# Altium PCB char.PcbDoc
Units mm, origin at the board's own origin, x right, y up, seen from the top; angles counter-clockwise.
Board outline 152.4 x 101.6 mm, 2 copper layers (Top Layer, Bottom Layer); 32 components, 40 nets, 77 pads, 0 vias.
Unrouted connection lines stored in the file: 43.
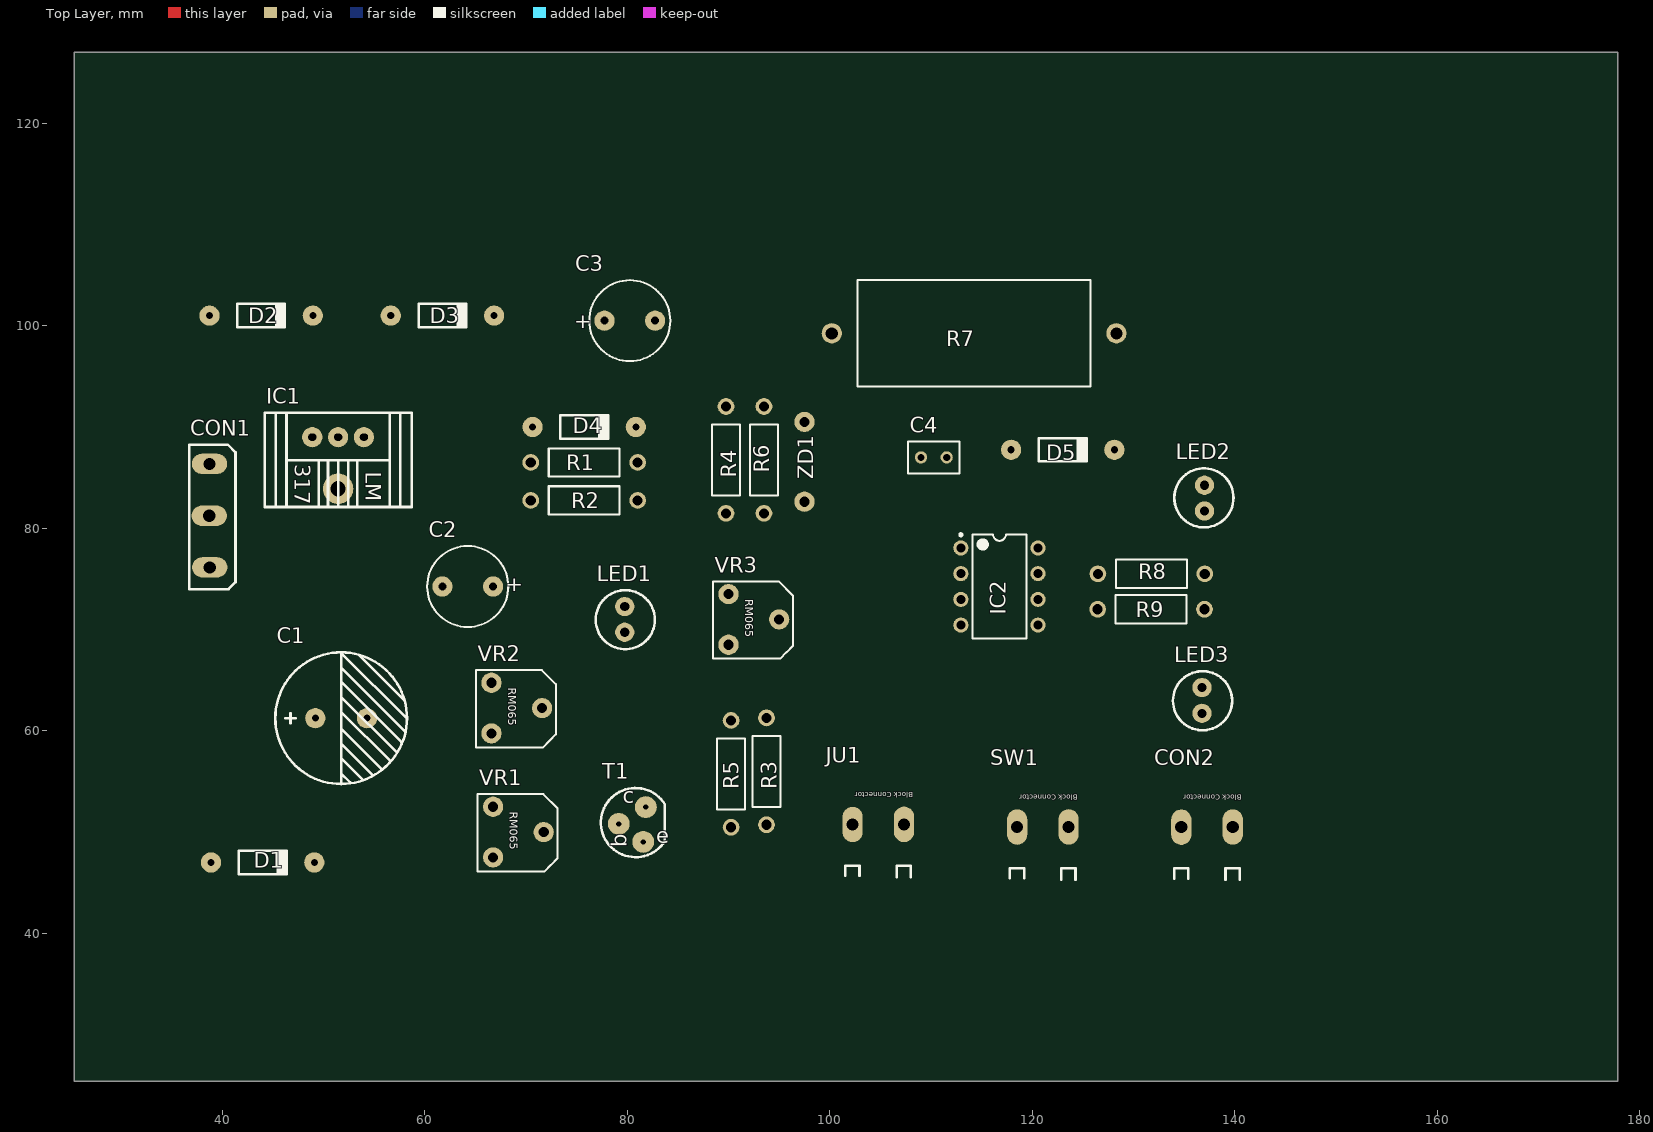
[diagram p0: Top Layer view]
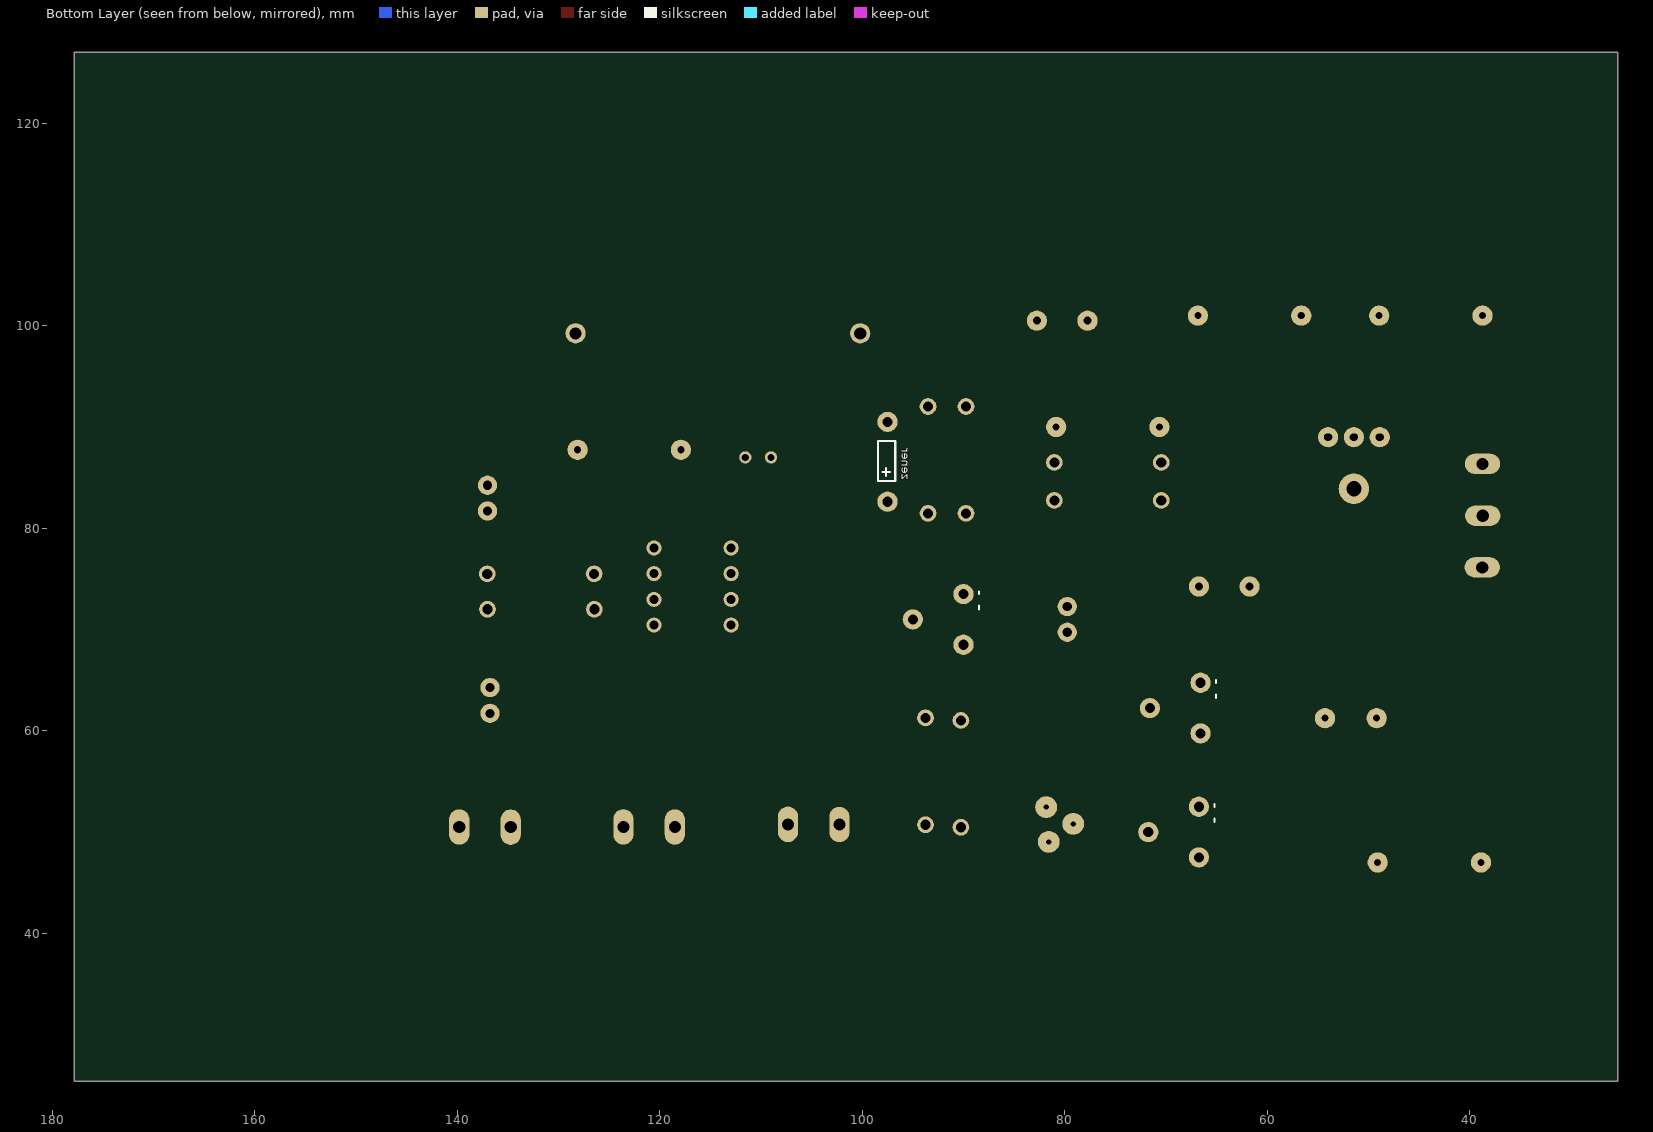
[diagram p1: Bottom Layer view, seen from below]

## Layer stack, top to bottom
Top Solder: solder mask 0.0102, Solder Resist, Dk 3.5
Top Layer: signal copper 0.0356
Dielectric 1: dielectric 0.32, FR-4, Dk 4.8
Bottom Layer: signal copper 0.0356
Bottom Solder: solder mask 0.0102, Solder Resist, Dk 3.5

## Board outline
25.4,25.4 177.8,25.4 177.8,127 25.4,127

## Design rules (kind name [scope] priority, off if disabled: settings)
Clearance [All] p1: gap=0.254 ignorepadtopadclearanceinfootprint=FALSE except(0: Arc-Hole Track-Hole SMDPad-Hole THPad-Hole Via-Hole Fill-Hole Poly-Hole Region-Hole Text-Hole)
PolygonConnect [All] p1: connectstyle=Relief reliefconductorwidth=0.254 reliefentries=4 polygonreliefangle="90 Angle" airgapwidth=0.254
RoutingVias [All] p1: holewidth=0.711 width=1.27 viastyle="Through Hole" minholewidth=0.711 minwidth=1.27 maxholewidth=0.711 maxwidth=1.27
SolderMaskExpansion [All] p1: expansion=0.102 istentingtop=FALSE
Width [All] p1: maxlimit=0.254 minlimit=0.254 preferedwidth=0.254
30 further rules are at their usual default settings.

## Components (designator, comment, footprint, x,y, rotation, side; value= is the part's Value field where it differs from the comment)
C1 "Comment" "2200uF 25V" 51.75,61.25 r180 top
C2 "Comment" CAPPR5-8x5 64.25,74.25 r180 top
C3 "Comment" CAPPR5-8x5 80.25,100.5 r0 top
C4 "Comment" C320C 117.27,94 r0 top
CON1 "Comment" "PCB Connector 3 pin" 38.75,81.25 r90 top
CON2 "Comment" "PCB Block Connector"#1 137.25,50.25 r180 top
D1 "Comment" "1N4007 Diode" 44,47 r0 top
D2 "Comment" "1N4007 Diode" 43.85,101 r0 top
D3 "Comment" "1N4007 Diode" 61.75,101 r0 top
D4 "Comment" "1N4007 Diode" 75.75,90 r0 top
D5 "Comment" "1N4007 Diode" 123,87.75 r0 top
IC1 "Comment" "LM317 with Heat Sink" 51.45,89 r180 top
IC2 "Comment" DIP-8 116.75,74.25 r0 top
JU1 "Comment" "PCB Block Connector"#1 104.79,50.51 r180 top
LED1 "Comment" LED 79.75,71 r0 top
LED2 "Comment" LED 137,82.98 r180 top
LED3 "Comment" LED 136.75,63 r0 top
R1 "Comment" RES10.55-7X2.8 75.75,86.5 r0 top
R2 "Comment" RES10.55-7X2.8 75.75,82.75 r0 top
R3 "Comment" RES10.55-7X2.8 93.75,56 r90 top
R4 "Comment" RES10.55-7X2.8 89.75,86.75 r90 top
R5 "Comment" RES10.55-7X2.8 90.25,55.75 r90 top
R6 "Comment" RES10.55-7X2.8 93.5,86.75 r90 top
R7 "Comment" RES28.1-23X10.5 114.25,99.25 r0 top
R8 "Comment" RES10.55-7X2.8 131.75,75.5 r0 top
R9 "Comment" RES10.55-7X2.8 131.725,72 r0 top
SW1 "Comment" "PCB Block Connector"#2 121.04,50.26 r180 top
T1 "Comment" "TO-92 Packaging" 80.5,50.75 r0 top
VR1 "Comment" PCBComponent_1#1 67.909,54.007 r270 top
VR2 "Comment" PCBComponent_1#1 67.75,66.25 r270 top
VR3 "Comment" PCBComponent_1#1 91.159,75.007 r270 top
ZD1 "Comment" PCBComponent_1#2 95.341,83.642 r90 top

## Footprints (in the part's own frame and the unit in brackets; to place one, negate y for a bottom-side part, rotate by r counter-clockwise, add the part's x,y. Pads: shape width x height; smd on the part's side, far side on the other; paste and mask are expansions set on the pad)
"1N4007 Diode" [mm]
  round 2 hole 0.7: n(5.1,0) p(-5.1,0)
  silkscreen extent -2.35,-1.15 2.35,1.15
"2200uF 25V" [mm] "13mm Diameter 5.1mm pin distance"
  round 2 hole 0.7: +(2.55,0) -(-2.55,0)
  silkscreen extent -6.5,-6.5 6.5,6.5
C320C [mm]
  round 1.21 hole 0.71: 1(-8.27,-7) 2(-5.73,-7)
  silkscreen extent -9.54,-8.59 -4.46,-5.41
CAPPR5-8x5 [mm] "Capacitor, Electrolytic, Radial; Body 8 x 5 mm (Dia.xH typ); Pin Spacing 5 mm (typ)"
  round 2 hole 0.8: 1(-2.5,0) 2(2.5,0)
  silkscreen extent -4,-4 4,4
DIP-8 [mm] "DIP, 8-Pin, Row Spacing 7.62 mm, Pitch 2.54 mm"
  round 1.5 hole 0.9: 1(-3.81,3.81) 2(-3.81,1.27) 3(-3.81,-1.27) 4(-3.81,-3.81) 5(3.81,-3.81) 6(3.81,-1.27) 7(3.81,1.27) 8(3.81,3.81)
  silkscreen extent -3.93,-5.15 2.65,5.23, body extent -3.6,-5.15 3.6,5.15, height 5.33
LED [mm]
  round 1.9 hole 0.9: 1(0,1.27) 2(0,-1.27)
  silkscreen extent -2.87,-2.95 2.98,2.89
"LM317 with Heat Sink" [mm]
  round 2 hole 0.7 slot 0.8 at 0 deg: adj(-2.55,0) in(2.55,0) out(0,0)
  round 3 hole 1.5: out(0,5.1)
  silkscreen extent -7.25,-2.4 7.25,6.9
"PCB Block Connector"#1 [mm]
  oval 2x3.5 hole 1.2: 1(-2.54,-0.254) 2(2.54,-0.24)
  silkscreen extent -3.22,3.82 3.26,4.96, body extent -5,-5.45 5.03,4.96, height 5.08
"PCB Block Connector"#2 [mm]
  oval 2x3.5 hole 1.2: 1(-2.54,-0.254) ""(2.54,-0.24)
  silkscreen extent -3.22,3.82 3.25,4.96, body extent -5,-5.45 5.03,4.96, height 5.08
"PCB Connector 3 pin" [mm] "PCB Connector 3 pin"
  oval 2x3.5 hole 1.2: 1(-5.11,-0.023) 2(-0.015,0.023) 3(5.11,-0.002)
  silkscreen extent -7.26,-2.57 7.01,2
PCBComponent_1#1 [mm]
  round 2 hole 1: 1(4.007,3.841) 2(1.507,-1.159) 3(6.507,-1.159)
  silkscreen extent 0.25,-2.68 7.87,5.21
PCBComponent_1#2 [mm]
  round 2 hole 1: 1(-1.016,-2.159) 2(6.858,-2.159)
RES10.55-7X2.8 [mm] "Resistor, Axial; Body 7 x 2.8 mm (LxDia. max), Lead Dia. 0.65 mm (max)"
  round 1.65 hole 1: 1(-5.275,0) 2(5.275,0)
  silkscreen extent -3.5,-1.4 3.5,1.4
RES28.1-23X10.5 [mm] "Resistor, Axial; Body 23 x 10.5 x 10.5mm (LxWxH max), Lead Dia. 0.85 mm (max)"
  round 2 hole 1.2: 1(-14.05,0) 2(14.05,0)
  silkscreen extent -11.5,-5.25 11.5,5.25
"TO-92 Packaging" [mil] "for 2N3904"
  round 85 hole 20: T(-52.5,2.5) T(42.5,-67.5) T(52.5,67.5)
  silkscreen extent -122,-127 127,142

## Nets (pads, with @x,y where several pads share a name; then routed paths per layer and width w, separated by ;. In a path a pad name is that pad's centre, name@x,y a point inside that pad or via, vN(x,y) a via of type N, cw(c..) or ccw(c..) an arc to the next point about the centre after c; other vN are vias at no path point)
1: CON1.3 D2.p
2: CON1.1 D1.p
3: D5.n R7.2
4: CON2.2 SW1.1
5: R5.2 VR3.3
6: JU1.2 R3.1
7: C1.+ D1.n D2.n D3.p IC1.in
8: C2.1 D4.p IC1.adj R1.1 VR2.2
9: LED1.1 R2.1
10: T1.T@81.833,52.465 VR1.2 VR2.1 VR2.3
11: R3.2 T1.T@79.166,50.814
12: IC2.1 IC2.5 JU1.1
13: LED2.1 R8.2
14: C4.2 D5.p IC2.8 LED2.2 SW1.
15: IC2.7 R8.1 R9.1
16: R4.1 VR3.2
17: 
18: C3.1 D3.n D4.n IC1.out@51.45,89 R1.2 R2.2 R4.2 R6.2 R7.1 ZD1.2
19: IC2.2 IC2.6 R6.1 ZD1.1
20: IC2.3 VR3.1
21: LED3.1 R9.2
22: 
23: 
24: 
25: 
26: 
27: 
28: 
29: 
30: 
31: 
32: 
33: 
34: 
35: 
36: 
37: 
38: 
39: 
40: 
pads on no net: C1.- C2.2 C3.2 C4.1 CON1.2 CON2.1 IC1.out@51.45,83.9 IC2.4 LED1.2 LED3.2 R5.1 T1.T@81.579,49.036 VR1.1 VR1.3

## Text inside footprints (layer, text, board x,y; h text height)
C2: Top Overlay "+" at 69.725,75 h1.5 r180
C3: Top Overlay "+" at 74.775,99.75 h1.5
CON2: Top Overlay "Block Connector" at 140.679,53.679 h0.51 r180
IC1: Top Overlay "LM" at 54.2,85.6 h1.52 r270; Top Overlay "317" at 47.15,86.3 h1.52 r270
JU1: Top Overlay "Block Connector" at 108.219,53.939 h0.51 r180
SW1: Top Overlay "Block Connector" at 124.469,53.689 h0.51 r180
T1: Top Overlay "c" at 79.547,52.846 h1.5; Top Overlay "e" at 82.849,48.909 h1.5; Top Overlay "b" at 79.928,48.528 h1.52 r90
VR1: Top Overlay "RM065" at 68.401,51.992 h0.8 r270
VR2: Top Overlay "RM065" at 68.242,64.235 h0.8 r270
VR3: Top Overlay "RM065" at 91.651,72.992 h0.8 r270
ZD1: Bottom Overlay "zener" at 96.103,84.785 h0.8 r90